# Altium PCB core_layer_backup_2018-12-05.PcbDoc
Units mil, origin at the board's own origin, x right, y up, seen from the top; angles counter-clockwise.
Board outline 4625.98 x 2647.64 mil, 2 copper layers (Top Layer, Bottom Layer); 32 components, 126 nets, 217 pads, 54 vias.
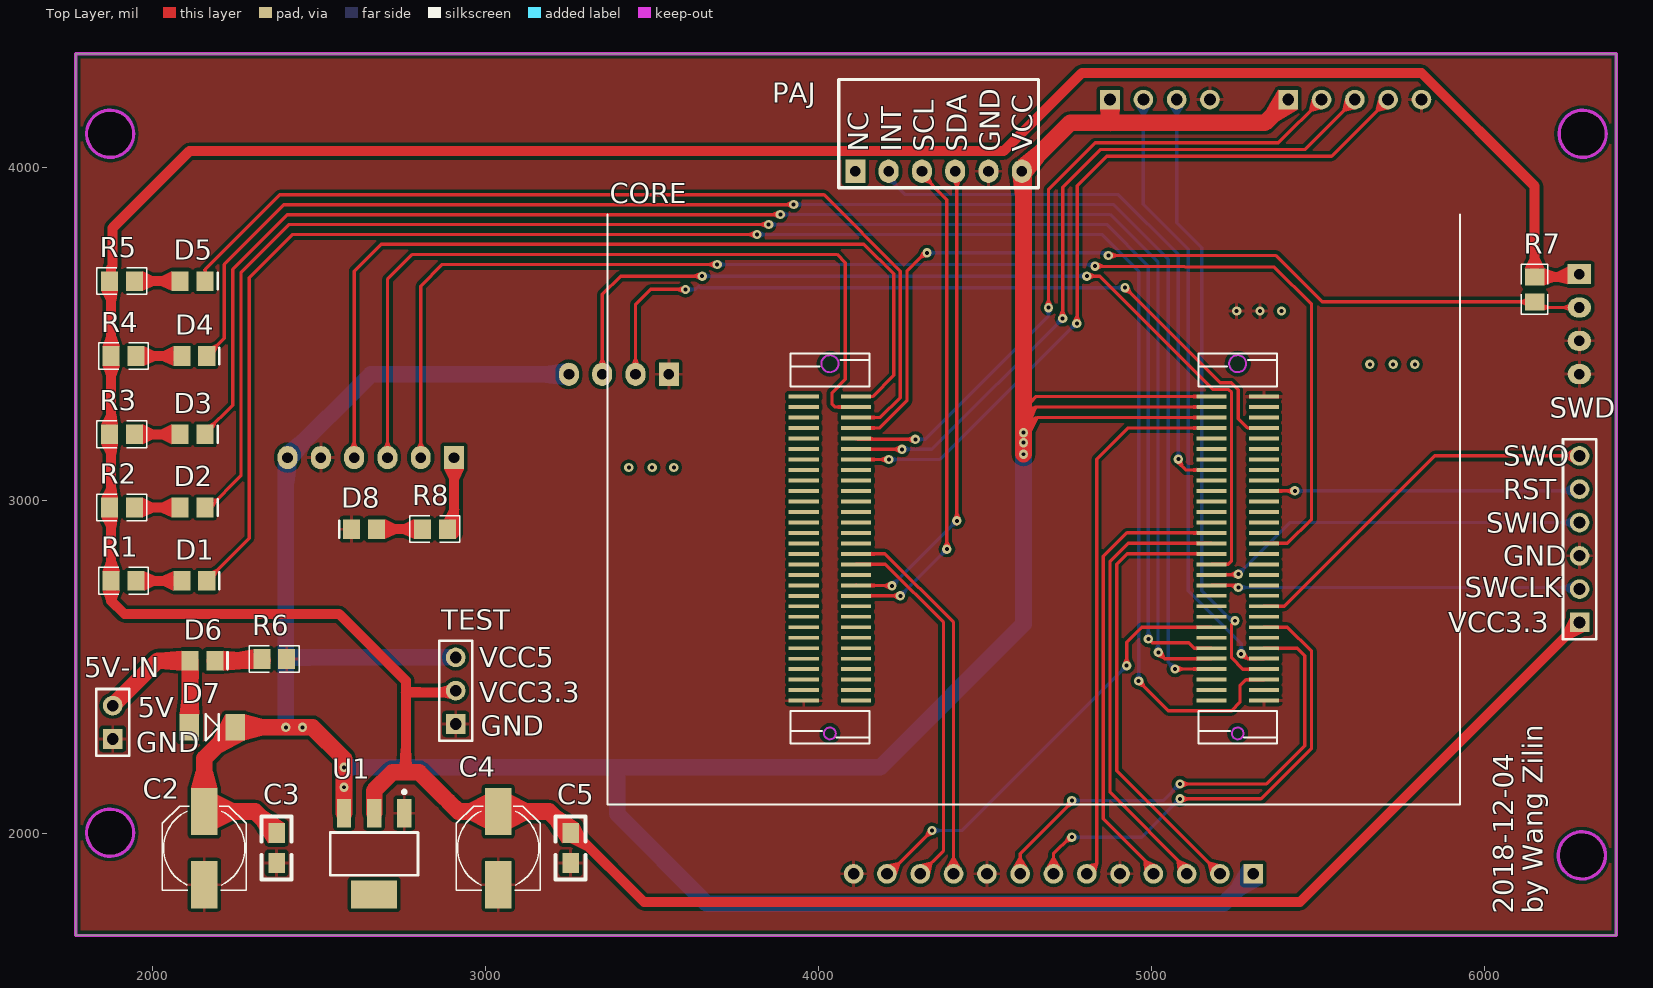
[diagram p0: Top Layer view]
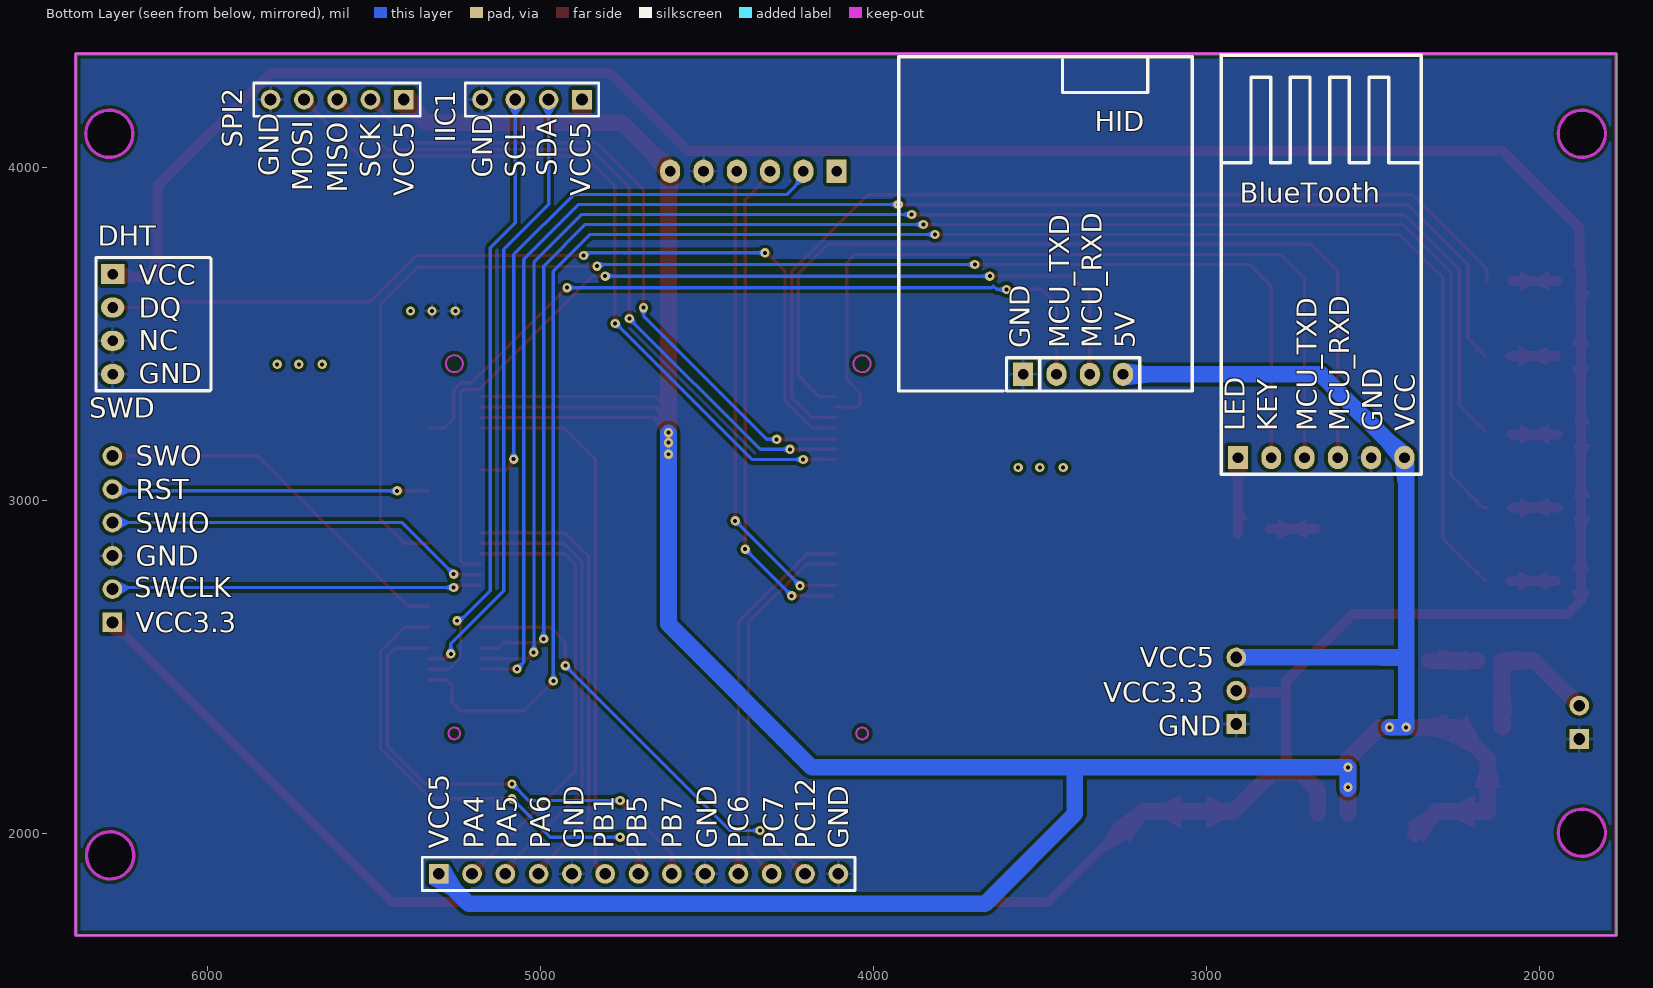
[diagram p1: Bottom Layer view, seen from below]

## Layer stack, top to bottom
Top Solder: solder mask 0.4, Solder Resist, Dk 3.5
Top Layer: signal copper 1.4
Dielectric 1: dielectric 12.6, FR-4, Dk 4.8
Bottom Layer: signal copper 1.4
Bottom Solder: solder mask 0.4, Solder Resist, Dk 3.5

## Board outline
1769.02,1695 6395,1695 6395,4342.64 1769.02,4342.64
cut-out: 6223.35,4102.28 ccw(c6294.21,4102.28) 6294.21,4031.42 ccw(c6294.21,4102.28) 6365.08,4102.28 ccw(c6294.21,4102.28) 6294.21,4173.15 ccw(c6294.21,4102.28)
cut-out: 6220.98,1935.35 ccw(c6291.85,1935.35) 6291.85,1864.49 ccw(c6291.85,1935.35) 6362.72,1935.35 ccw(c6291.85,1935.35) 6291.85,2006.22 ccw(c6291.85,1935.35)
cut-out: 1801.3,2003.46 ccw(c1872.17,2003.46) 1872.17,1932.6 ccw(c1872.17,2003.46) 1943.03,2003.46 ccw(c1872.17,2003.46) 1872.17,2074.33 ccw(c1872.17,2003.46)
cut-out: 1872.17,4031.42 cw(c1872.17,4102.28) 1801.3,4102.28 cw(c1872.17,4102.28) 1872.17,4173.15 cw(c1872.17,4102.28) 1943.03,4102.28 cw(c1872.17,4102.28)

## Design rules (kind name [scope] priority, off if disabled: settings)
Clearance [All] p1: gap=10 ignorepadtopadclearanceinfootprint=FALSE except(0: Arc-Hole Track-Hole SMDPad-Hole THPad-Hole Via-Hole Fill-Hole Poly-Hole Region-Hole Text-Hole)
PolygonConnect [All] p1: connectstyle=Relief reliefconductorwidth=10 reliefentries=4 polygonreliefangle="90 Angle" airgapwidth=10
RoutingVias [All] p1: holewidth=28 width=50 viastyle="Through Hole" minholewidth=28 minwidth=50 maxholewidth=28 maxwidth=50
SolderMaskExpansion [All] p1: expansion=4
Width [All] p1: maxlimit=50 minlimit=10 preferedwidth=30
30 further rules are at their usual default settings.

## Components (designator, comment, footprint, x,y, rotation, side; value= is the part's Value field where it differs from the comment)
5V-IN "Header 2" HDR2X1_A 1880,2285 r90 top
BlueTooth "ATK-BC05-V12" ATK-BC05-V12 2905,3130 r90 bottom (schematic designator M2)
C2 "Cap Pol" C-RB-S6 2155,1957.25 r270 top value=100uF
C3 "104" 0805 2372.35,2002.25 r270 top
C4 "Cap Pol" C-RB-S6 3037.71,1957.25 r270 top value=100uF
C5 "104" 0805 3254.94,1912.25 r90 top
CORE "STM32F4&F7_CB" STM32F4&F7_CB 5336.87,3313.43 r180 top
D1 "LED0" LED_0805 2125,2760 r0 top
D2 "LED0" LED_0805 2120,2980 r0 top
D3 "LED0" LED_0805 2120,3200 r0 top
D4 "LED0" LED_0805 2125,3435 r0 top
D5 "LED0" LED_0805 2120,3660 r0 top
D6 "LED0" LED_0805 2149.59,2520 r0 top
D7 "Diode" DIODE-1206 2110,2320 r0 top
D8 "LED0" LED_0805 2634.8,2915 r180 top
DHT "DHT11" DTH11 6245,3570 r180 bottom
HID "USART_HID" USART_HID 3550,3380 r90 bottom (schematic designator M1)
IIC1 "Header 4" HDR1X4 4875,4205 r0 bottom
P1 "Header 13" HDR1X13 5305,1880 r180 bottom
PAJ "ATK-PAJ7620U2" ATK-AJ7620U2 4110,3990 r90 top
R1 "Res1" 0805-1 1912.4,2760 r0 top value=1K
R2 "Res1" 0805-1 1907.4,2980 r0 top value=1K
R3 "Res1" 0805-1 1907.4,3200 r0 top value=1K
R4 "Res1" 0805-1 1912.4,3435 r0 top value=1K
R5 "Res1" 0805-1 1907.4,3660 r0 top value=1K
R6 "Res1" 0805-1 2365,2525 r0 top value=10K
R7 "Res1" 0805-1 6150,3635 r270 top value=4.7K
R8 "Res1" 0805-1 2847.4,2915 r180 top value=1K
SPI2 "Header 5" HDR1X5 5410,4205 r0 bottom (schematic designator SPI1)
SWD "Header 6" HDR1X6 6285,2635 r90 top
TEST "Header 3" HDR1X3 2910,2330 r90 top
U1 "LM1117-3.3" DSO-G3 2665,1940 r180 top

## Footprints (in the part's own frame and the unit in brackets; to place one, negate y for a bottom-side part, rotate by r counter-clockwise, add the part's x,y. Pads: shape width x height; smd on the part's side, far side on the other; paste and mask are expansions set on the pad)
0805 [mil]
  rect 60x50 smd: 1(0,-0.06) 2(90,-0.06)
  silkscreen extent -50,-45 140,45
0805-1 [mm] "贴片带丝印"
  rect 1.3x1.5 smd: 1(-0.95,0) 2(0.95,0)
  silkscreen extent -1.91,-1.02 1.91,1.02, body extent -1.14,-0.51 1.14,0.51, height 1
ATK-AJ7620U2 [mil]
  rect 70x60 hole 32: 1(0,0)
  oval 70x60 hole 32: 2(0,-100) 3(0,-200) 4(0,-300) 5(0,-400) 6(0,-500)
  silkscreen extent -50,-550 276,50
ATK-BC05-V12 [mil]
  rect 70x60 hole 32: 1(0,0)
  oval 70x60 hole 32: 2(0,-100) 3(0,-200) 4(0,-300) 5(0,-400) 6(0,-500)
  silkscreen extent -50,-550 1210,50
C-RB-S6 [mm] "贴片电解"
  rect 3.6x2 smd: 1(-2.794,0) 2(2.794,0)
  silkscreen extent -3.2,-3.2 3.2,3.2
DIODE-1206 [mm] "玻璃封装二极管"
  rect 1.5x2 smd: 1(0,0) 2(3.5,0)
  silkscreen extent 1.25,-1 2.25,1
DSO-G3 [mm]
  rect 1.1x2.15 smd: 1(-2.3,-3.1) 2(0,-3.1) 3(2.3,-3.1)
  rect 3.5x2.15 smd: 4(0,3.1)
  silkscreen extent -3.35,-4.85 3.35,1.62
DTH11 [mil]
  rect 70x60 hole 32: 1(-39.37,110.63)
  oval 70x60 hole 32: 2(-39.37,10.63) 3(-39.37,-89.37) 4(-39.37,-189.37)
  silkscreen extent -89,-239 256,161
HDR1X3 [mm] "Connector; Header; 3 Position"
  rect 1.5x1.5 hole 0.9: 1(0,0)
  round 1.5 hole 0.9: 2(2.54,0) 3(5.08,0)
  silkscreen extent -1.27,-1.27 6.35,1.27
HDR1X4 [mm]
  rect 1.5x1.5 hole 0.9: 1(0,0)
  round 1.5 hole 0.9: 2(2.54,0) 3(5.08,0) 4(7.62,0)
  silkscreen extent -1.27,-1.27 8.89,1.27
HDR1X5 [mm] "Connector; Header; 5 Position"
  rect 1.5x1.5 hole 0.9: 1(0,0)
  round 1.5 hole 0.9: 2(2.54,0) 3(5.08,0) 4(7.62,0) 5(10.16,0)
  silkscreen extent -1.27,-1.27 11.43,1.27
HDR1X6 [mm] "Connector; Header; 6 Position"
  rect 1.5x1.5 hole 0.9: 1(0,0)
  round 1.5 hole 0.9: 2(2.54,0) 3(5.08,0) 4(7.62,0) 5(10.16,0) 6(12.7,0)
  silkscreen extent -1.27,-1.27 13.97,1.27
HDR1X13 [mm] "Connector; Header; 13 Position"
  rect 1.5x1.5 hole 0.9: 1(0,0)
  round 1.5 hole 0.9: 2(2.54,0) 3(5.08,0) 4(7.62,0) 5(10.16,0) 6(12.7,0) 7(15.24,0) 8(17.78,0) 9(20.32,0) 10(22.86,0) 11(25.4,0) 12(27.94,0) 13(30.48,0)
  silkscreen extent -1.27,-1.27 31.75,1.27
HDR2X1_A [mm] "Connector; Header; 2 Position"
  rect 1.5x1.5 hole 0.9: 1(0,0)
  round 1.5 hole 0.9: 2(2.54,0)
  silkscreen extent -1.27,-1.27 3.81,1.27
LED_0805 [mm] "贴片二极管"
  rect 1.3x1.5 smd: 1(-0.95,0) 2(0.95,0)
  silkscreen extent 1.91,-0.64 1.91,0.64
STM32F4&F7_CB [mm]
  rect 2.3x0.3 smd: J1_1(0,0) J1_2(0,0.8) J1_3(0,1.6) J1_4(0,2.4) J1_5(0,3.2) J1_6(0,4) J1_7(0,4.8) J1_8(0,5.6) J1_9(0,6.4) J1_10(0,7.2) J1_11(0,8) J1_12(0,8.8) J1_13(0,9.6) J1_14(0,10.4) J1_15(0,11.2) J1_16(0,12) J1_17(0,12.8) J1_18(0,13.6) J1_19(0,14.4) J1_20(0,15.2) J1_21(0,16) J1_22(0,16.8) J1_23(0,17.6) J1_24(0,18.4) J1_25(0,19.2) J1_26(0,20) J1_27(0,20.8) J1_28(0,21.6) J1_29(0,22.4) J1_30(0,23.2) J1_31(4,23.2) J1_32(4,22.4) J1_33(4,21.6) J1_34(4,20.8) J1_35(4,20) J1_36(4,19.2) J1_37(4,18.4) J1_38(4,17.6) J1_39(4,16.8) J1_40(4,16) J1_41(4,15.2) J1_42(4,14.4) J1_43(4,13.6) J1_44(4,12.8) J1_45(4,12) J1_46(4,11.2) J1_47(4,10.4) J1_48(4,9.6) J1_49(4,8.8) J1_50(4,8) J1_51(4,7.2) J1_52(4,6.4) J1_53(4,5.6) J1_54(4,4.8) J1_55(4,4) J1_56(4,3.2) J1_57(4,2.4) J1_58(4,1.6) J1_59(4,0.8) J1_60(4,0) J2_1(31.1,0.001) J2_2(31.1,0.801) J2_3(31.1,1.601) J2_4(31.1,2.401) J2_5(31.1,3.201) J2_6(31.1,4.001) J2_7(31.1,4.801) J2_8(31.1,5.601) J2_9(31.1,6.401) J2_10(31.1,7.201) J2_11(31.1,8.001) J2_12(31.1,8.801) J2_13(31.1,9.601) J2_14(31.1,10.401) J2_15(31.1,11.201) J2_16(31.1,12.001) J2_17(31.1,12.801) J2_18(31.1,13.601) J2_19(31.1,14.401) J2_20(31.1,15.201) J2_21(31.1,16.001) J2_22(31.1,16.801) J2_23(31.1,17.601) J2_24(31.1,18.401) J2_25(31.1,19.201) J2_26(31.1,20.001) J2_27(31.1,20.801) J2_28(31.1,21.601) J2_29(31.1,22.401) J2_30(31.1,23.201) J2_31(35.1,23.201) J2_32(35.1,22.401) J2_33(35.1,21.601) J2_34(35.1,20.801) J2_35(35.1,20.001) J2_36(35.1,19.201) J2_37(35.1,18.401) J2_38(35.1,17.601) J2_39(35.1,16.801) J2_40(35.1,16.001) J2_41(35.1,15.201) J2_42(35.1,14.401) J2_43(35.1,13.601) J2_44(35.1,12.801) J2_45(35.1,12.001) J2_46(35.1,11.201) J2_47(35.1,10.401) J2_48(35.1,9.601) J2_49(35.1,8.801) J2_50(35.1,8.001) J2_51(35.1,7.201) J2_52(35.1,6.401) J2_53(35.1,5.601) J2_54(35.1,4.801) J2_55(35.1,4.001) J2_56(35.1,3.201) J2_57(35.1,2.401) J2_58(35.1,1.601) J2_59(35.1,0.801) J2_60(35.1,0.001)
  Keep-Out Layer circle w0.152: c33.1,25.701 r0.45
  Keep-Out Layer circle w0.152: c33.1,-2.499 r0.65
  Keep-Out Layer circle w0.152: c2,-2.5 r0.65
  Keep-Out Layer circle w0.152: c2,25.7 r0.45
  silkscreen extent -14.95,-13.87 50.05,31.13
USART_HID [mil]
  rect 70x60 hole 32: 1(0,0)
  oval 70x60 hole 32: 2(0,-100) 3(0,-200) 4(0,-300)
  silkscreen extent -50,-507 954,374

## Part data
5V-IN: "接插件", LatestRevisionDate=17-Jul-2002, LatestRevisionNote="Re-released for DXP Platform.", Publisher="Altium Limited"
C2 C4: "极性电解电容", LatestRevisionDate=17-Jul-2002, LatestRevisionNote="Re-released for DXP Platform.", PackageReference=RB7.6-15, Published=8-Jun-2000, Publisher="Altium Limited", Vol=16V
C3 C5: library part C
CORE: "F429/746 Core Board"
D1 D2 D3 D4 D5 D6 D8: "发光二极管", LatestRevisionDate=08-Jul-2005, LatestRevisionNote="Mech Layer 1 removed.", PackageReference=LED-0, Published=8-Jun-2000, Publisher="Altium Limited"
D7: "二极管", PackageDocument=Sep-1996, Code_JEDEC=DO-214-AB, LatestRevisionDate=17-Jul-2002, LatestRevisionNote="Re-released for DXP Platform.", PackageReference=SMC, Published=8-Jun-2000, Publisher="Altium Limited", Type=1N4001
IIC1: "Header, 4-Pin", LatestRevisionDate=17-Jul-2002, LatestRevisionNote="Re-released for DXP Platform.", Publisher="Altium Limited"
P1: "Header, 13-Pin", LatestRevisionDate=17-Jul-2002, LatestRevisionNote="Re-released for DXP Platform.", Publisher="Altium Limited"
R1 R2 R3 R4 R5 R6 R7 R8: "贴片电阻", LatestRevisionDate=17-Jul-2002, LatestRevisionNote="Re-released for DXP Platform.", PackageReference=AXIAL-0.4, Published=8-Jun-2000, Publisher="Altium Limited"
SPI2: "Header, 5-Pin", LatestRevisionDate=17-Jul-2002, LatestRevisionNote="Re-released for DXP Platform.", Publisher="Altium Limited"
SWD: "Header, 6-Pin", LatestRevisionDate=17-Jul-2002, LatestRevisionNote="Re-released for DXP Platform.", Publisher="Altium Limited"
TEST: "Header, 3-Pin", LatestRevisionDate=17-Jul-2002, LatestRevisionNote="Re-released for DXP Platform.", Publisher="Altium Limited"
U1: library part LM1117

## Via types
v1: diameter 28, hole 12, Top Layer to Bottom Layer, 54 vias

## Nets (pads, with @x,y where several pads share a name; then routed paths per layer and width w, separated by ;. In a path a pad name is that pad's centre, name@x,y a point inside that pad or via, vN(x,y) a via of type N, cw(c..) or ccw(c..) an arc to the next point about the centre after c; other vN are vias at no path point)
BC_LED: BlueTooth.1 R8.1 | length 230
  Top Layer w30: R8.1@2905,2900 BlueTooth.1
BOOT0: CORE.J1_31
GND: 5V-IN.1 BlueTooth.5 C2.2 C3.2 C4.2 C5.1 CORE.J1_1 CORE.J1_30 CORE.J2_31 D8.2 DHT.3 DHT.4 HID.1 IIC1.4 P1.5 P1.9 P1.13 PAJ.5 R6.2 SPI2.5 SWD.3 TEST.1 U1.1
  other v1: 5255,3570 5325,3570
IIC_SCL: CORE.J1_26 IIC1.2 | length 1872.1
  Top Layer w10: v1@5265,2548.78 v1@5268.67,2545.12 ; v1(5268.67,2540.6) v1@5268.67,2545.12 ; CORE.J1_26 5287.76,2526.02 v1@5268.67,2545.12
  Bottom Layer w10: IIC1.2 4975,3890 5110,3755 5110,2730 5269,2571 5269,2540.93 v1(5268.67,2540.6)
IIC_SDA: CORE.J1_27 IIC1.3 | length 1870.3
  Top Layer w10: v1(5250,2640) 5239.67,2629.67 5239.67,2528.59 5273.73,2494.53 CORE.J1_27
  Bottom Layer w10: IIC1.3 5075,3835 5150,3760 5150,2730 5240,2640 v1(5250,2640)
LED1: CORE.J1_28 D1.2 | length 5444.2
  Top Layer w10: D1.2 2290,2887.6 2290,3670 2420,3800 v1(3815,3800) ; v1(4961,2459) 5050,2370 5240,2370 5265,2395 5265,2445 5283.03,2463.03 CORE.J1_28
  Bottom Layer w10: v1(3815,3800) 4850,3800 4961,3689 v1(4961,2459)
LED2: CORE.J1_36 D2.2 | length 4914.6
  Top Layer w10: D2.2 2170,2980 2265,3075 2265,3685 2410,3830 ; 2410,3829.75 v1@3850,3829.75 ; v1(4990,2585) 5001,2574 5111,2574 5127.48,2557.52 CORE.J1_36
  Bottom Layer w10: v1(3850,3830) 4865,3830 4990,3705 v1(4990,2585)
LED3: CORE.J1_35 D3.2 | length 4772.8
  Top Layer w10: D3.2@2162.4,3210 2240,3287.6 2240,3695 2405,3860 ; 2405,3859.5 v1@3895,3859.5 ; v1(5020,2545) 5038.98,2526.02 CORE.J1_35
  Bottom Layer w10: v1(3885,3860) 4875,3860 5019,3716 5019,2546 v1(5020,2545)
LED4: CORE.J1_34 D4.2 | length 4620.2
  Top Layer w10: D4.2 2215,3487.6 ; 2215,3490 2215,3710 2395,3890 ; 2395,3889.25 v1@3925,3889.25 ; v1(5070,2495) 5178.92,2495 CORE.J1_34
  Bottom Layer w10: v1(3925,3890) 4885,3890 5050,3725 5050,2515 v1(5070,2495)
LED5: CORE.J2_3 D5.2 | length 2847.4
  Top Layer w10: D5.2 2157.4,3695 2381.4,3919 4016,3919 4245,3690 4245,3310 4185.39,3250.39 CORE.J2_3
Net5V-IN_2: 5V-IN.2 D6.1 D7.1 | length 489
  Top Layer w50: 5V-IN.2 2015,2520 D6.1 2112.19,2322.19 D7.1
NetD1_1: D1.1 R1.2 | length 137.8
  Top Layer w30: R1.2 D1.1
NetD2_1: D2.1 R2.2 | length 137.8
  Top Layer w30: R2.2 D2.1
NetD3_1: D3.1 R3.2 | length 137.8
  Top Layer w30: R3.2 D3.1
NetD4_1: D4.1 R4.2 | length 137.8
  Top Layer w30: R4.2 D4.1
NetD5_1: D5.1 R5.2 | length 137.8
  Top Layer w30: R5.2 D5.1
NetD6_2: D6.2 R6.1 | length 143.2
  Top Layer w50: D6.2 R6.1@2330.2,2520
NetD8_1: D8.1 R8.2 | length 137.8
  Top Layer w30: D8.1 R8.2
PA0: CORE.J2_42
PA1: CORE.J1_3
PA2: CORE.J1_4 HID.2 | length 2347.1
  Top Layer w10: HID.2 3450,3590 3495,3635 v1(3600,3635) ; v1(4920,3640) 5205.67,3354.33 5239.17,3354.33 5259.67,3333.83 5259.67,3246.84 5287.57,3218.94 CORE.J1_4
  Bottom Layer w10: v1(3600,3635) 3630,3635 3640,3645 3645,3640 v1(4920,3640)
PA3: CORE.J1_44 HID.3 | length 2867.6
  Top Layer w10: HID.3 3350,3620 3405,3675 v1(3650,3675) ; v1(4805,3675) 4843.99,3675 5184.66,3334.33 5230.88,3334.33 5239.67,3325.54 5239.67,2819.67 5229.49,2809.49 CORE.J1_44
  Bottom Layer w10: v1(3650,3675) v1(4805,3675)
PA4: CORE.J1_45 P1.2 | length 1356.5
  Top Layer w10: CORE.J1_45 4925.98,2840.98 4895,2810 4895,2190 5195,1890 P1.2@5210,1890
PA5: CORE.J1_46 P1.3 | length 1352.5
  Top Layer w10: P1.3@5110,1890 4875,2125 4875,2818.28 4929.2,2872.48 CORE.J1_46
PA6: CORE.J1_47 P1.4 | length 1361.2
  Top Layer w10: P1.4@5010,1890 4855,2045 4855,2833.28 4925.69,2903.98 CORE.J1_47
PA7: CORE.J1_48
PA8: CORE.J2_20 PAJ.3 | length 1490.7
  Top Layer w10: CORE.J2_20@4122.52,2715 v1(4245,2715) ; PAJ.3@4300,3990 4385,3905 v1(4385,2855)
  Bottom Layer w10: v1(4245,2715) v1(4385,2855)
PA9: CORE.J1_51
PA10: CORE.J1_52
PA11: CORE.J1_53 PAJ.2 | length 1718.8
  Top Layer w10: v1(5080,3125) 5080,3115 5102.05,3092.95 CORE.J1_53
  Bottom Layer w10: PAJ.2 4210,3970 4260,3920 4900,3920 5080,3740 v1(5080,3125)
PA12: CORE.J1_54
PA13: CORE.J1_43 SWD.4 | length 1170.6
  Top Layer w10: CORE.J1_43 5257.99,2777.99 v1(5260,2780)
  Bottom Layer w10: v1(5260,2780) 5415,2935 SWD.4
PA14: CORE.J1_42 SWD.2 | length 1110.4
  Top Layer w10: CORE.J1_42 5253.5,2746.5 v1(5260,2740)
  Bottom Layer w10: v1(5260,2740) 6280,2740 SWD.2@6285,2745
PA15: CORE.J1_41
PB0: CORE.J1_56
PB1: CORE.J1_57 P1.6 | length 1640.7
  Top Layer w10: P1.6 4835,1910 4835,3125 4928.94,3218.94 CORE.J1_57
PB2: CORE.J1_55
PB3: CORE.J1_21 SWD.6 | length 1135.1
  Top Layer w10: CORE.J1_21 5398.5,2683.5 5850,3135 SWD.6
PB4: CORE.J1_22
PB5: CORE.J1_23 P1.7 | length 1430.8
  Top Layer w10: P1.7 4705,1940 4755,1990 v1(4760,1990) ; v1(5085,2105) 5328.28,2105 5480,2256.72 5480,2548.28 5407.77,2620.51 CORE.J1_23
  Bottom Layer w10: v1(4760,1990) 4970,1990 v1(5085,2105)
PB6: CORE.J1_24
PB7: CORE.J1_25 P1.8 | length 1455
  Top Layer w10: P1.8 4605,1940 4760,2095 v1(4760,2100) ; v1(5085,2150) 5345,2150 5460,2265 5460,2535 5437.48,2557.52 CORE.J1_25
  Bottom Layer w10: v1(4760,2100) 5035,2100 v1(5085,2150)
PB10: BlueTooth.3 CORE.J2_2 | length 2468.8
  Top Layer w10: BlueTooth.3 2705,3665 2780,3740 4055,3740 4080,3715 4080,3365 4040,3325 4040,3290 4048.11,3281.89 CORE.J2_2
PB11: BlueTooth.4 CORE.J2_1 | length 2694.3
  Top Layer w10: BlueTooth.4 2605,3690 2686,3771 4135.72,3771 4225,3681.72 4225,3376.77 4161.61,3313.39 CORE.J2_1
PB12: CORE.J2_4 DHT.2 R7.2 | length 2686.3
  Top Layer w10: CORE.J2_4 4183.9,3218.9 4265,3300 4265,3690 4320,3745 v1(4325,3745) ; v1(4870,3736.64) 5373.36,3736.64 5512.4,3597.6 R7.2 6166.97,3580.63 DHT.2
  Bottom Layer w10: v1(4325,3745) 4861.64,3745 v1(4870,3736.64)
PB13: CORE.J2_5 SPI2.2 | length 2043.6
  Top Layer w10: CORE.J2_5 4114.88,3185 v1(4290,3185) ; v1(4690,3580) 4690,3935 4830,4075 5380,4075 SPI2.2
  Bottom Layer w10: v1(4290,3185) 4320,3185 4690,3555 v1(4690,3580)
PB14: CORE.J2_6 SPI2.3 | length 2164.2
  Top Layer w10: CORE.J2_6 4113.39,3155 v1(4250,3155) ; v1(4732.5,3547.5) 4732.5,3942.5 4845,4055 5460,4055 SPI2.3
  Bottom Layer w10: v1(4250,3155) 4340,3155 v1(4732.5,3547.5)
PB15: CORE.J2_7 SPI2.4 | length 2290.3
  Top Layer w10: CORE.J2_7 v1(4210.59,3124.41) ; v1(4775,3532.5) 4776,3533.5 4776,3946 4865,4035 5540,4035 SPI2.4
  Bottom Layer w10: v1(4210.59,3124.41) 4364.41,3124.41 4775,3535 v1(4775,3532.5)
PC1: CORE.J1_9
PC4: CORE.J1_49
PC5: CORE.J1_50
PC6: CORE.J2_16 P1.10 | length 1132.8
  Top Layer w10: CORE.J2_16 4199.06,2840.94 4405,2635 P1.10
PC7: CORE.J2_17 P1.11 | length 1118.8
  Top Layer w10: CORE.J2_17 4200.55,2809.45 4375,2635 4375,1950 P1.11
PC8: CORE.J2_18
PC9: CORE.J2_19 PAJ.4 | length 1449.8
  Top Layer w10: CORE.J2_19 v1(4220,2745) ; PAJ.4@4400,3990 4400,3985 4415,3970 v1(4415,2940) v1@4415,2930
  Bottom Layer w10: v1@4219.49,2745.51 4413.99,2940 v1(4415,2940)
PC10: CORE.J1_40
PC11: CORE.J1_39
PC12: CORE.J1_38 P1.12 | length 1322.1
  Top Layer w10: P1.12 4210,1880 v1(4340,2010) ; v1(4925,2505) 4925,2575 4970.51,2620.51 CORE.J1_38
  Bottom Layer w10: v1(4340,2010) 4430,2010 v1(4925,2505)
PD0: CORE.J2_47
PD1: CORE.J2_48
PD2: CORE.J1_37
PD4: CORE.J2_26
PD5: CORE.J2_22
PD6: CORE.J2_27
PD8: CORE.J2_58
PD9: CORE.J2_59
PD10: CORE.J2_60
PD11: CORE.J2_23
PD12: CORE.J2_21
PD13: CORE.J2_14
PD14: CORE.J2_45
PD15: CORE.J2_46
PE0: CORE.J2_43
PE1: CORE.J2_44
PE2: CORE.J1_20
PE3: CORE.J1_19
PE4: CORE.J1_18
PE5: CORE.J1_17
PE6: CORE.J1_16
PE7: CORE.J2_49
PE8: CORE.J2_50
PE9: CORE.J2_51
PE10: CORE.J2_52
PE11: CORE.J2_53
PE12: CORE.J2_54
PE13: CORE.J2_55
PE14: CORE.J2_56
PE15: CORE.J2_57
PF6: CORE.J1_14
PF7: CORE.J1_13
PF8: CORE.J1_12
PF9: CORE.J1_11
PG3: CORE.J2_13
PG6: CORE.J2_15
PG11: CORE.J2_35
PG12: CORE.J2_25
PG13: CORE.J1_33
PG14: CORE.J1_32
PH2: CORE.J1_5
PH3: CORE.J1_6
PH4: CORE.J1_8
PH5: CORE.J1_7
PH6: CORE.J2_8
PH7: CORE.J2_9
PH9: CORE.J2_10
PH10: CORE.J2_11
PH11: CORE.J2_12
PH12: CORE.J2_24
PH13: CORE.J2_30
PH14: CORE.J2_29
PH15: CORE.J2_28
PI0: CORE.J2_34
PI1: CORE.J2_33
PI2: CORE.J2_32
PI3: CORE.J2_41
PI4: CORE.J2_36
PI5: CORE.J2_37
PI6: CORE.J2_38
PI7: CORE.J2_39
PI8: CORE.J2_40
PI11: BlueTooth.2 CORE.J1_15 | length 4083.6
  Top Layer w10: BlueTooth.2 2805,3645 2870,3710 v1(3695,3710) ; v1(4830,3705) 5367.99,3702.01 5480,3590 5480,2945 5407.48,2872.48 CORE.J1_15
  Bottom Layer w10: v1(3695,3710) 4825,3710 v1(4830,3705)
RESET: CORE.J1_10 SWD.5 | length 950.2
  Top Layer w10: CORE.J1_10 v1(5430,3029.96)
  Bottom Layer w10: v1(5430,3029.96) 6279.96,3029.96 SWD.5
VBAT: CORE.J1_29
VCC3.3: C4.1 C5.2 DHT.1 R1.1 R2.1 R3.1 R4.1 R5.1 R7.1 SWD.1 TEST.2 U1.2 | length 11754.9
  Top Layer w30: R5.1 R5.1@1875,3665 ; 1875,3700 R5.1@1875,3665 ; 1880,3705 1880,3820 2110,4050 4555,4050 4790,4285 5810,4285 6150,3945 R7.1 6276.14,3672.4 DHT.1 ; 2760,2180 2760,2185 2760,2425 ; TEST.2 2905,2425 2760,2425 ; C5.2 3267.75,2002.25 3475,1795 5445,1795 SWD.1 ; R5.1@1875,3665 R4.1 R1.1 1875,2700 1915,2660 2560,2660 2760,2460 2760,2425
  Top Layer w50: U1.2 2665,2130 2720,2185 2760,2185 2800,2185 2875,2110 ; 2887.5,2097.5 2917.75,2067.25 C4.1 3190,2067.25 C5.2
VCC5: BlueTooth.6 C2.1 C3.1 CORE.J1_58 CORE.J1_59 CORE.J1_60 D7.2 HID.4 IIC1.1 P1.1 PAJ.6 SPI2.1 TEST.3 U1.3 | length 11949.4
  Top Layer w10: v1@4615,3210 4655.43,3250.43 CORE.J1_58 ; 4615,3245 4651.93,3281.93 CORE.J1_59 ; 4615,3295 4635,3295 4653.43,3313.43 CORE.J1_60
  Top Layer w50: C3.1 2307.29,2067.25 C2.1 2155,2227.2 D7.2 v1(2400,2320) v1(2450,2320) 2480,2320 2574.45,2225.55 v1(2574.45,2200) v1(2574.45,2140) U1.3 ; PAJ.6 4755,4135 4875,4135 ; v1(4615,3140) v1(4615,3175) v1(4615,3205) 4615,3210 4615,3245 4615,3295 PAJ.6@4615,3975 ; IIC1.1 4875,4135 ; SPI2.1 5340,4135 4875,4135
  Bottom Layer w50: BlueTooth.6@2405,3115 2400,3110 2400,2530 ; BlueTooth.6 2655,3380 HID.4 ; v1(2450,2320) v1(2400,2320) 2400,2530 ; v1@2574.45,2135.55 v1(2574.45,2140) v1(2574.45,2200) 4185,2200 4615,2630 v1(4615,3140) v1(4615,3175) v1(4615,3205) ; TEST.3 2400,2530 ; 3395,2195 3395,2060 3665,1790 5215,1790 P1.1
VREF+: CORE.J1_2
pads on no net: PAJ.1 U1.4
copper on no net:
  other v1: 3430,3100 3500,3100 3565,3100 5655,3410 5725,3410 5790,3410 5390,3570

## Polygon pours and split planes (outlines as drawn)
GND on Top Layer "Top Layer-No Net" (solid, pour order 22): 1780,4335 1775,4330 1775,1700 6385,1700 6390,1705 6390,4340
GND on Bottom Layer "Top Layer-No Net" (solid, pour order 24): 1769.02,1695.98 6390.98,1695.98 6395,1700 6390,1705 6390,4335 1775,4335

## Keep-outs
Keep-Out Layer:
  circle w10: c6294.21,4102.28 r70.87
  circle w10: c6291.85,1935.35 r70.87
  circle w10: c1872.17,2003.46 r70.87
  circle w10: c1872.17,4102.28 r70.87
  lines w10: 1769.02,1695 6395,1695 6395,4342.64 1769.02,4342.64 1769.02,1695.98

## Silkscreen, mask and mechanical layers (free items; w line width, h text height)
Top Overlay:
  text "SWO" at 6055,3105 h60
  text "RST" at 6055,3005 h60
  text "SWIO" at 6005,2905 h60
  text "GND" at 6055,2805 h60
  text "SWCLK" at 5940,2710 h60
  text "VCC3.3" at 5890,2605 h60
  text "VCC5" at 2980,2500 h60
  text "VCC3.3" at 2980,2395 h60
  text "5V" at 1955,2350 h60
  text "GND" at 2985,2295 h60
  text "GND" at 1950,2245 h60
  text "2018-12-04 / by Wang Zilin" at 6175,1760 h60 r90
Bottom Overlay:
  text "SDA" at 4950,3975 h60 r270
  text "GND" at 5785,3975 h60 r270
  text "SCL" at 5045,3970 h60 r270
  text "GND" at 5145,3970 h60 r270
  text "SCK" at 5480,3970 h60 r270
  text "MOSI" at 5685,3930 h60 r270
  text "MISO" at 5580,3925 h60 r270
  text "VCC5" at 4850,3915 h60 r270
  text "VCC5" at 5380,3915 h60 r270
  text "SWD" at 6355,3250 h60
  text "SWO" at 6215,3105 h60
  text "RST" at 6215,3005 h60
  text "SWIO" at 6215,2905 h60
  text "GND" at 6215,2805 h60
  text "SWCLK" at 6220,2710 h60
  text "VCC3.3" at 6215,2605 h60
  text "VCC5" at 3200,2500 h60
  text "VCC3.3" at 3310,2395 h60
  text "GND" at 3145,2295 h60
  text "GND" at 4075,1955 h60 r270
  text "PC12" at 4175,1955 h60 r270
  text "PC7" at 4270,1955 h60 r270
  text "PC6" at 4375,1955 h60 r270
  text "GND" at 4470,1955 h60 r270
  text "PB7" at 4575,1955 h60 r270
  text "PB5" at 4680,1955 h60 r270
  text "PB1" at 4780,1955 h60 r270
  text "GND" at 4870,1955 h60 r270
  text "PA6" at 4970,1955 h60 r270
  text "PA5" at 5070,1955 h60 r270
  text "PA4" at 5170,1955 h60 r270
  text "VCC5" at 5275,1955 h60 r270

## Text inside footprints (layer, text, board x,y; h text height)
BlueTooth: Bottom Overlay "VCC" at 2373.5,3208.74 h60 r270; Bottom Overlay "GND" at 2471.93,3208.74 h60 r270; Bottom Overlay "MCU_RXD" at 2570.35,3208.74 h60 r270; Bottom Overlay "MCU_TXD" at 2668.78,3208.74 h60 r270; Bottom Overlay "KEY" at 2786.89,3208.74 h60 r270; Bottom Overlay "LED" at 2885.32,3208.74 h60 r270
DHT: Bottom Overlay "GND" at 6205.63,3353.46 h60; Bottom Overlay "NC" at 6205.63,3451.89 h60; Bottom Overlay "DQ" at 6205.63,3550.32 h60; Bottom Overlay "VCC" at 6205.63,3648.74 h60
HID: Bottom Overlay "GND" at 3530.32,3458.74 h60 r270; Bottom Overlay "MCU_TXD" at 3412.2,3458.74 h60 r270; Bottom Overlay "MCU_RXD" at 3313.78,3458.74 h60 r270; Bottom Overlay "5V" at 3215.35,3458.74 h60 r270
PAJ: Top Overlay "VCC" at 4641.5,4049.06 h60 r90; Top Overlay "GND" at 4543.07,4049.06 h60 r90; Top Overlay "SDA" at 4444.65,4049.06 h60 r90; Top Overlay "SCL" at 4346.22,4049.06 h60 r90; Top Overlay "INT" at 4247.8,4049.06 h60 r90; Top Overlay "NC" at 4149.37,4049.06 h60 r90